# EAGLE board Stepper Driver v2 (EAGLE 5.02)
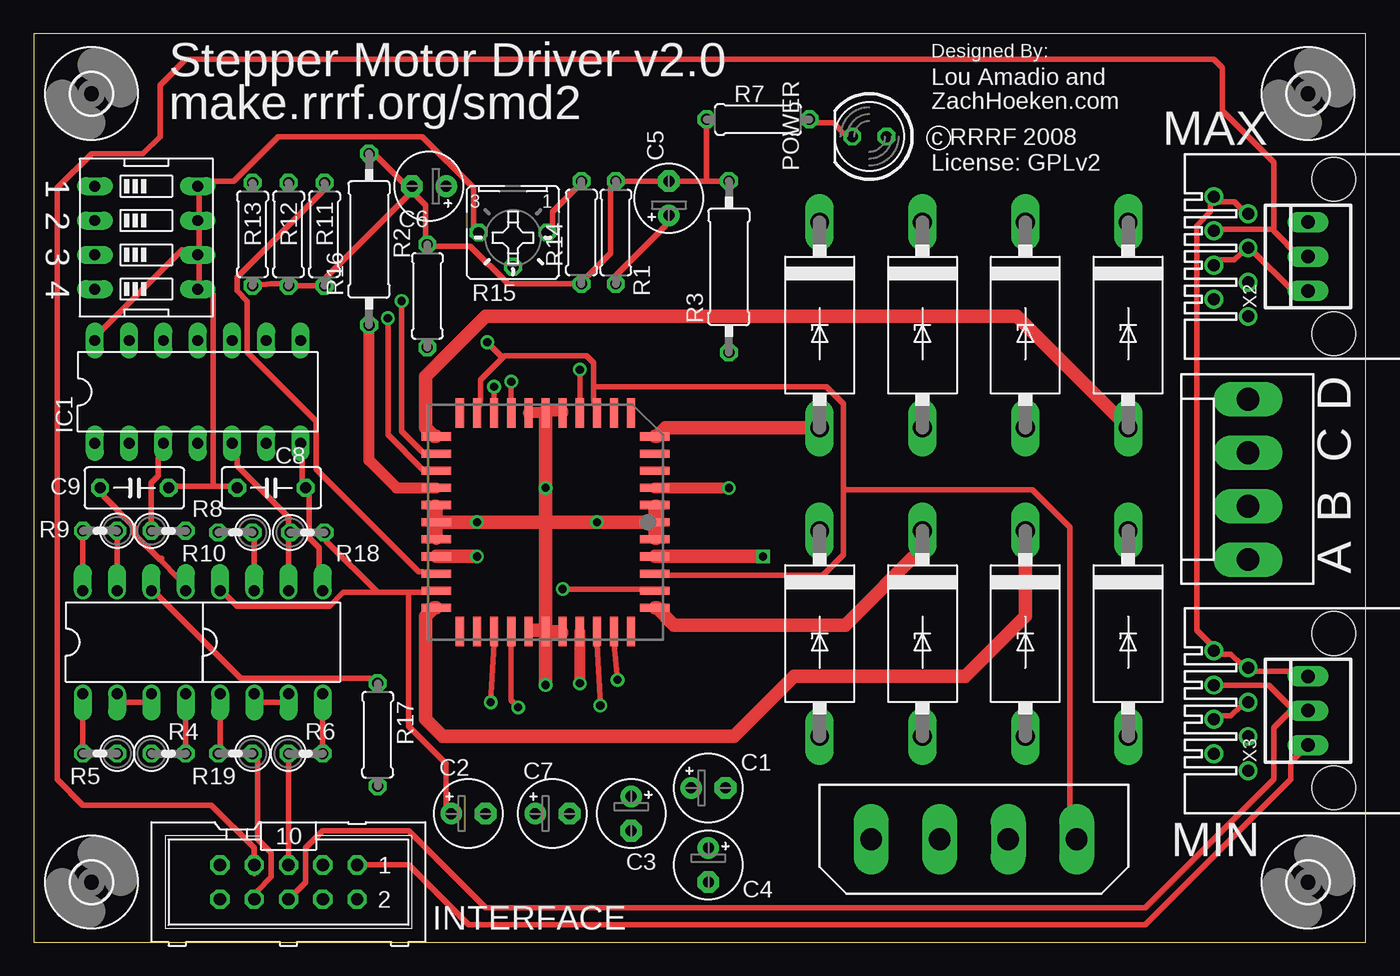
[diagram p0: board, top side]
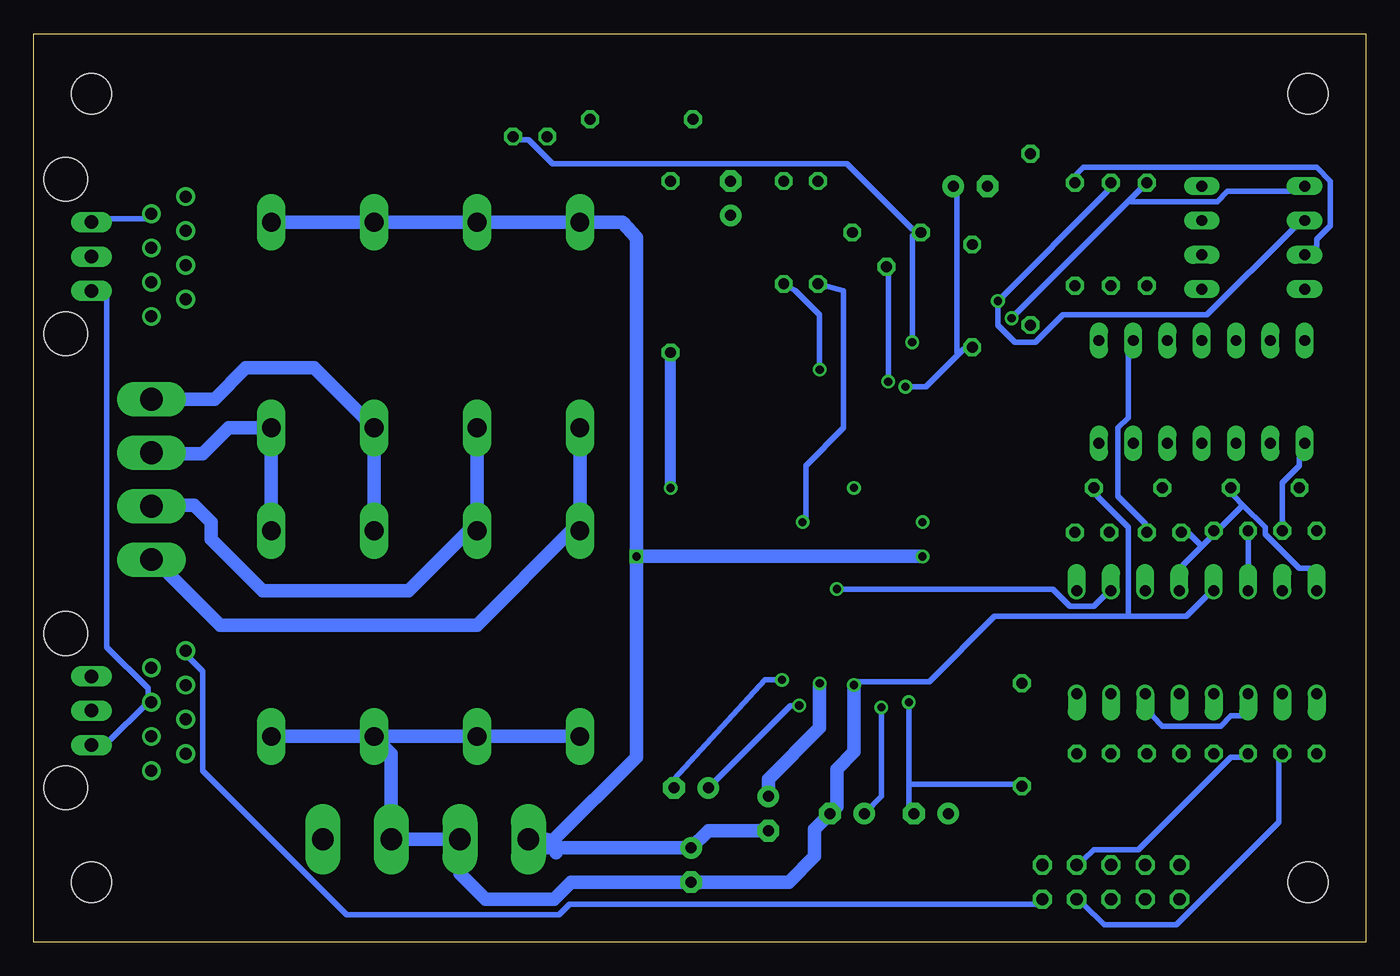
[diagram p1: board, bottom side, seen from below]

Size 98.73 x 67.3 mm. Coordinates in mm from the lower left corner, seen from the top.
Outline: 0,0 98.73,0 98.73,67.3 0,67.3 0,0
Copper layers (1*16): Top 0.035mm / dielectric 1.5mm / Bottom 0.035mm
Design rules "default": minimum track width 10mil, minimum drill 24mil, track to track 8mil, track to pad 8mil, pad to pad 8mil, via to via 8mil, smd to smd 8mil, copper to edge 40mil, drill to drill 8mil, minimum pad ring 10mil, minimum via ring 8mil, stop-mask expansion 4mil, vias tented up to drill 0mil, thermal gap 10mil
Net classes: 0 default: width 0.406 mm; 1 Power: width 1.016 mm, clearance 0.508 mm

## Footprints (pad centres in the part's own frame; a part is rotated, then mirrored left to right if it is on the bottom)
E2,5-5 = drill 0.813 pad 1.6 round: + -1.27,0 | drill 0.813 pad 1.6 octagon: - 1.27,0
C050-030X075 = drill 0.813 octagon: 1 -2.54,0; 2 2.54,0
CB429-15 = drill 1.397 long: A 7.62,0; C -7.62,0
PLCC44 = smd 0.6 x 2.2: 1 0,8.1; 2 -1.27,8.1; 3 -2.54,8.1; 4 -3.81,8.1; 5 -5.08,8.1; 6 -6.35,8.1; 18 -6.35,-8.1; 19 -5.08,-8.1; 20 -3.81,-8.1; 21 -2.54,-8.1; 22 -1.27,-8.1; 23 0,-8.1; 24 1.27,-8.1; 25 2.54,-8.1; 26 3.81,-8.1; 27 5.08,-8.1; 28 6.35,-8.1; 40 6.35,8.1; 41 5.08,8.1; 42 3.81,8.1; 43 2.54,8.1; 44 1.27,8.1 | smd 2.2 x 0.6: 7 -8.1,6.35; 8 -8.1,5.08; 9 -8.1,3.81; 10 -8.1,2.54; 11 -8.1,1.27; 12 -8.1,0; 13 -8.1,-1.27; 14 -8.1,-2.54; 15 -8.1,-3.81; 16 -8.1,-5.08; 17 -8.1,-6.35; 29 8.1,-6.35; 30 8.1,-5.08; 31 8.1,-3.81; 32 8.1,-2.54; 33 8.1,-1.27; 34 8.1,0; 35 8.1,1.27; 36 8.1,2.54; 37 8.1,3.81; 38 8.1,5.08; 39 8.1,6.35
DIL14 = drill 0.813 long: 1 -7.62,-3.81; 2 -5.08,-3.81; 3 -2.54,-3.81; 4 0,-3.81; 5 2.54,-3.81; 6 5.08,-3.81; 7 7.62,-3.81; 8 7.62,3.81; 9 5.08,3.81; 10 2.54,3.81; 11 0,3.81; 12 -2.54,3.81; 13 -5.08,3.81; 14 -7.62,3.81
520426-4 = drill 0.889 round: 1 -4.445,6.35; 2 -3.175,8.89; 3 -1.905,6.35; 4 -0.635,8.89; 5 0.635,6.35; 6 1.905,8.89; 7 3.175,6.35; 8 4.445,8.89 | hole 3.251: -5.715,0; 5.715,0
LED5MM = drill 0.813 octagon: A -1.27,0; K 1.27,0
DIL08 = drill 0.813 offset: 1 -3.81,-3.81; 2 -1.27,-3.81; 3 1.27,-3.81; 4 3.81,-3.81; 5 3.81,3.81; 6 1.27,3.81; 7 -1.27,3.81; 8 -3.81,3.81
9090-4V = drill 1.6 pad 2.6 long: 1 -7.62,0; 2 -2.54,0; 3 2.54,0; 4 7.62,0
0207/7 = drill 0.813 octagon: 1 -3.81,0; 2 3.81,0
0309/12 = drill 0.813 octagon: 1 -6.35,0; 2 6.35,0
0207/2V = drill 0.813 octagon: 1 -1.27,0; 2 1.27,0
B25P = drill 0.813 octagon: A -2.54,0; E 2.54,0; S 0,2.54
ML10 = drill 0.914 octagon: 1 -5.08,-1.27; 2 -5.08,1.27; 3 -2.54,-1.27; 4 -2.54,1.27; 5 0,-1.27; 6 0,1.27; 7 2.54,-1.27; 8 2.54,1.27; 9 5.08,-1.27; 10 5.08,1.27
EDG-04 = drill 0.813 long: 1 -3.81,-3.81; 2 -1.27,-3.81; 3 1.27,-3.81; 4 3.81,-3.81; 5 3.81,3.81; 6 1.27,3.81; 7 -1.27,3.81; 8 -3.81,3.81
3,0 = hole 3: 0,0
KK-156-4 = drill 1.7 pad 2.184 long: 1 -5.94,0; 2 -1.98,0; 3 1.98,0; 4 5.94,0
22-23-2031 = drill 1 long: 1 -2.54,0; 2 0,0; 3 2.54,0

## Placement (x,y rotation side)
C1  .22uF  [E2,5-5]  50,11.42 0 top
C2  .001uF  [E2,5-5]  32.22,9.52 0 top
C3  .22uF  [E2,5-5]  44.29,9.52 270 top
C4  100uF  [E2,5-5]  50,5.71 270 top
C5  680pF  [E2,5-5]  47.08,55.11 90 top
C6  [E2,5-5]  29.3,56 180 top
C7  .33uF  [E2,5-5]  38.44,9.52 0 top
C8  [C050-030X075]  17.62,33.65 180 top
C9  [C050-030X075]  7.46,33.65 0 top
D1M  SB360  [CB429-15]  58.26,22.86 270 top
D1P  SB360  [CB429-15]  58.26,45.71 270 top
D2M  SB360  [CB429-15]  65.88,22.86 270 top
D2P  SB360  [CB429-15]  65.88,45.71 270 top
D3M  Sb360  [CB429-15]  73.49,22.86 270 top
D3P  SB360  [CB429-15]  73.49,45.71 270 top
D4M  SB360  [CB429-15]  81.11,22.86 270 top
D4P  SB360  [CB429-15]  81.11,45.71 270 top
DRIVER  A3977  [PLCC44]  37.94,31.11 270 top
IC1  74ALS04N  [DIL14]  12.15,40.76 0 top
J1  [520426-4]  96.35,50.79 90 top
J2  [520426-4]  96.35,17.14 90 top
LED1  [LED5MM]  61.94,59.68 180 top
OK1  HCPL2630  [DIL08]  17.62,22.22 0 top
OK2  HCPL2630  [DIL08]  7.46,22.22 0 top
POWER  9090-4V  [9090-4V]  69.68,7.62 180 top
R1  20k  [0207/7]  43.14,52.57 270 top
R2  20k  [0207/7]  29.17,47.87 270 top
R3  0.75  [0309/12]  51.52,50.03 90 top
R4  220  [0207/2V]  10,13.96 0 top
R5  220  [0207/2V]  4.92,13.96 180 top
R6  220  [0207/2V]  20.16,13.96 0 top
R7  560  [0207/7]  53.68,60.95 0 top
R8  3.3k  [0207/2V]  10,30.48 0 top
R9  3.3k  [0207/2V]  4.92,30.48 180 top
R10  3.3k  [0207/2V]  20.28,30.35 0 top
R11  10K  [0207/7]  21.55,52.45 270 top
R12  10K  [0207/7]  18.89,52.45 270 top
R13  10K  [0207/7]  16.22,52.45 270 top
R14  2.2k  [0207/7]  40.6,52.57 90 top
R15  [B25P]  35.52,52.57 180 top
R16  0.75  [0309/12]  24.85,52.06 90 top
R17  1K  [0207/7]  25.49,15.36 270 top
R18  3.3k  [0207/2V]  14.95,30.35 180 top
R19  220  [0207/2V]  14.95,13.96 180 top
SV1  [ML10]  18.89,4.44 180 top
SW1  [EDG-04]  8.34,52.19 270 top
U$1  [3,0]  4.28,62.86 0 top
U$2  [3,0]  94.45,62.86 0 top
U$3  [3,0]  4.28,4.44 0 top
U$4  [3,0]  94.45,4.44 0 top
X1  [KK-156-4]  90,34.28 90 top
X2  22-23-2031  [22-23-2031]  94.45,50.79 90 top
X3  22-23-2031  [22-23-2031]  94.45,17.14 90 top

## Library data of the parts
C1-C9 R3-R13 R16 R17 = rcl
D1M D1P D2M D2P D3M D3P D4M D4P = diode
DRIVER = linear
IC1 = 74xx-us
J1 J2 = con-amp
LED1 = led
OK1 OK2 = optocoupler
POWER = con-thomas-betts
R1 R2 R14 R18 R19 = resistor
R15 = pot
SV1 = con-harting-ml
SW1 = special
U$1-U$4 = holes
X1-X3 = con-molex

## Nets
A [Power]: D1M.C D1P.A DRIVER.6 X1.1
B [Power]: D2M.C D2P.A DRIVER.40 X1.2
C: D4M.C D4P.A DRIVER.18 X1.3
D [Power]: D3M.C D3P.A DRIVER.28 X1.4
DIR: DRIVER.5
ENABLE: DRIVER.41
EXT_DIR: R5.1 SV1.4
EXT_ENABLE: R6.1 SV1.5
EXT_GND: J1.7 J1.8 J2.7 J2.8 SV1.2 X2.3 X3.3
EXT_STEP: R4.1 SV1.3
EXT_VCC: J1.4 J1.5 J2.4 J2.5 SV1.1 X2.1 X3.1
EXTRA: R19.1 SV1.8
GND: C4.- C5.- C6.- C7.- C8.1 C9.1 D1M.A D2M.A D3M.A D4M.A DRIVER.1 DRIVER.2 DRIVER.11 DRIVER.12 DRIVER.13 DRIVER.22 DRIVER.23 DRIVER.24 DRIVER.33 DRIVER.34 DRIVER.35 DRIVER.44 IC1.7 OK1.5 OK2.5 POWER.2 POWER.3 R1.1 R2.1 R3.2 R7.1 R11.2 R12.2 R13.2 R14.1 R16.2
MAX: J1.6 SV1.7 X2.2
MIN: J2.6 SV1.6 X3.2
MS1: DRIVER.20 R13.1 SW1.1
MS2: DRIVER.19 R12.1 SW1.2
N$1: C7.+ DRIVER.32
N$2: DRIVER.21 R16.1
N$3: DRIVER.3 R3.1
N$4 [Power]: C3.+ DRIVER.36
N$5: C1.+ DRIVER.37
N$6: C1.- DRIVER.38
N$7: C5.+ DRIVER.10 R1.2
N$8: LED1.K R7.2
N$9: R14.2 R15.A
N$10: OK1.2 OK1.3 OK2.2 OK2.3
N$11: C6.+ DRIVER.15 R2.2
N$12: OK2.4 R4.2
N$13: DRIVER.14 R15.S
N$14: C2.- DRIVER.31 R17.2
N$15: OK2.1 R5.2
N$16: IC1.3 OK2.6 R8.1
N$18: OK1.4 R6.2
N$19: IC1.1 OK2.7 R9.1
N$20: IC1.5 OK1.6 R10.1
N$21: IC1.2
N$22: IC1.4
N$23: IC1.6
N$25: IC1.9 OK1.7 R18.1
N$26: OK1.1 R19.2
SR: DRIVER.26 R11.1 SW1.3
STEP: R17.1
VC+ [Power]: C3.- C4.+ D1P.C D2P.C D3P.C D4P.C DRIVER.25 DRIVER.43 POWER.4
VCC: C2.+ C8.2 C9.2 DRIVER.9 DRIVER.16 DRIVER.27 DRIVER.42 IC1.14 LED1.A OK1.8 OK2.8 POWER.1 R8.2 R9.2 R10.2 R15.E R18.2 SW1.5 SW1.6 SW1.7 SW1.8

## Tracks (layer width: path | path; a pad name or v marks a point on that pad's centre or on a via)
A
  Top 1.016: DRIVER.6 46.19,37.46 46.83,38.09 D1P.A
  Bottom 1.016: X1.1 90,28.57 84.92,23.49 65.88,23.49 58.89,30.48 D1M.C D1P.A 58.26,38.73
B
  Top 1.016: D2M.C 65.88,29.21 60.16,23.49 47.46,23.49 46.19,24.76 DRIVER.40
  Bottom 1.016: D2P.A D2M.C 66.51,30.48 70.95,26.03 81.75,26.03 85.56,29.84 85.56,31.11 86.83,32.38 90,32.38 X1.2
C
  Top 1.016: D4P.A 72.86,46.35 33.49,46.35 29.05,41.9 29.05,38.09 29.68,37.46 DRIVER.18
  Bottom 1.016: D4M.C D4P.A 84.29,38.09 86.19,36.19 90,36.19 X1.3
D
  Top 1.016: D3M.C 73.49,24.12 69.05,19.68 56.35,19.68 51.91,15.23 30.32,15.23 29.05,16.51 29.05,24.12 29.68,24.76 DRIVER.28
  Bottom 1.016: D3M.C D3P.A 77.94,42.54 83.02,42.54 85.33,40.22 X1.4
ENABLE  (via drill 0.61)
  Top 0.406: v39.2,26.16 45.05,26.16 DRIVER.41
  Bottom 0.406: v39.2,26.16 23.2,26.16 21.93,24.89 20.16,24.89 19.39,25.65
EXT_DIR
  Bottom 0.406: R5.1 6.44,13.46 6.44,8.88 14.06,1.27 19.39,1.27 20.92,2.79 SV1.4
EXT_ENABLE
  Top 0.406: SV1.5 R6.1
EXT_GND
  Top 0.406: J1.7 89.5,54.35 88.99,54.86 87.97,54.86 J1.8 87.21,54.6 87.21,54.1 86.19,53.08 86.19,23.11 87.21,22.09 J2.8 87.97,21.33 88.73,21.33 89.5,20.57 J2.7 90.51,20.06 93.05,20.06 X3.3
  Bottom 0.406: J1.7 90.51,53.59 93.05,53.59 X2.3 | SV1.2 24.47,2.79 59.02,2.79 59.78,2.03 75.53,2.03 86.19,12.69 86.19,20.06 87.21,21.08 J2.8
EXT_STEP
  Bottom 0.406: R4.1 9.23,13.71 10,13.71 16.85,6.85 20.16,6.85 20.92,6.09 SV1.3
EXT_VCC
  Top 0.406: SV1.1 27.78,5.71 32.22,1.27 82.38,1.27 93.18,12.06 93.18,13.33 X3.1 | J2.4 87.97,16.76 88.73,16.76 89.5,17.52 J2.5 | J1.4 87.97,50.54 88.99,50.54 89.5,51.05 J1.5 90.51,51.05 93.05,48.51 X2.1
  Bottom 0.406: X3.1 93.05,14.98 90.51,17.52 J2.5 90.26,18.28 90.26,18.79 93.31,21.84 93.31,47.75 X2.1
EXTRA
  Top 0.406: R19.1 16.6,13.46 16.6,7.62 17.62,6.6 17.62,4.82 16.6,3.81 SV1.8
GND  (via drill 0.6)
  Top 0.254: DRIVER.2 46.06,32.25 | DRIVER.1 46.06,31.24 | 36.92,23.11 DRIVER.33 | 37.68,23.11 DRIVER.34 | DRIVER.35 38.95,23.11
  Top 0.406: 9.36,28.32 10.76,26.92 OK2.5 | 9.36,28.32 7.46,30.22 7.46,30.73 5.17,33.02 C9.1 | 9.36,28.32 9.49,28.44 | 49.87,56.38 R3.2 | 49.87,56.38 C5.- R1.1 42.76,55.88 42.76,51.05 40.98,49.27 R14.1 35.14,48.76 32.35,51.56 29.81,51.56 R2.1 29.05,52.32 29.05,54.6 28.28,55.37 C6.- | 49.87,56.38 R7.1 | R13.2 17.62,48.76 19.14,48.76 R12.2 R11.2 21.68,49.27 27.78,55.37 C6.- | IC1.7 19.9,35.81 19.9,34.28 C8.1 20.41,33.02 20.41,29.97 21.17,29.21 21.17,27.94 OK1.5 | R16.2 25.49,58.16 27.52,56.13 C6.-
  Top 0.813: 37.78,39.21 DRIVER.13 | DRIVER.11 39.2,39.36 37.94,39.36 | DRIVER.2 46.19,32.38 46.04,32.22 | DRIVER.44 46.19,29.84 46.04,30 | 29.68,31.11 DRIVER.24 | DRIVER.22 29.68,32.38 29.84,32.22 | DRIVER.35 39.2,22.86 39.05,23.01
  Top 1.016: DRIVER.1 46.19,31.11 | 37.94,31.11 v32.86,31.11 DRIVER.23 | 37.94,31.11 v41.74,31.11 DRIVER.1 | DRIVER.34 37.94,31.11 | 37.94,31.11 v37.94,33.65 DRIVER.12 37.94,39.36 37.78,39.21 | DRIVER.1 46.04,32.22 | DRIVER.1 46.04,30 | DRIVER.23 29.84,30 29.68,31.11 | DRIVER.23 29.84,32.22 | DRIVER.34 39.05,23.01 | 36.92,23.11 37.68,23.11 37.94,22.86 | 37.94,22.86 DRIVER.34 | v37.94,19.05 37.94,22.86
  Bottom 0.406: 17.62,24.12 13.3,24.12 11.77,25.65 OK2.5 | 17.62,24.12 27.52,24.12 32.35,19.3 37.68,19.3 v37.94,19.05 | R14.1 38.7,48.25 38.7,38.09 41.49,35.3 41.49,31.49 v41.74,31.11 | 17.62,24.12 17.62,30.73 19.9,33.02 C8.1
  Bottom 1.016: D3M.A 72.22,13.96 POWER.2 POWER.3 67.14,5.08 65.24,3.17 60.16,3.17 58.89,4.44 C4.- 42.76,4.44 40.86,6.34 40.86,8.38 C7.- 39.2,10.03 39.2,12.82 37.94,14.09 v37.94,19.05 | D3M.A D4M.A | D3M.A D2M.A D1M.A
MAX
  Top 0.406: X2.2 93.81,50.79 91.91,52.7 91.91,52.83 | 91.91,52.83 91.91,57.78 88.1,61.59 88.1,64.77 87.46,65.4 11.27,65.4 9.36,63.49 9.36,59.68 8.09,58.41 4.28,58.41 1.74,55.88 1.74,12.06 3.65,10.15 13.17,10.15 16.35,6.98 SV1.7 16.35,5.08 | J1.6 87.97,52.83 91.91,52.83
MIN
  Top 0.406: SV1.6 20.16,4.44 20.16,6.98 21.43,8.25 27.78,8.25 33.49,2.54 82.38,2.54 91.91,12.06 91.91,15.87 93.18,17.14 X3.2 93.05,17.52 91.53,19.05 J2.6
MS1  (via drill 0.61)
  Top 0.406: v26.25,46.22 26.25,37.59 28.79,35.05 DRIVER.20
  Bottom 0.406: 17.49,54.99 v26.25,46.22 | 17.49,54.99 R13.1 | SW1.1 5.68,55.62 10.25,55.62 11.01,54.86 17.36,54.86 17.49,54.99
MS2  (via drill 0.61)
  Top 0.406: v27.27,47.49 27.27,37.84 28.79,36.32 DRIVER.19
  Bottom 0.406: R12.1 19.14,55.62 v27.27,47.49 27.27,45.71 26,44.45 24.47,44.45 22.44,46.48 11.77,46.48 5.42,52.83 SW1.2
N$1  (via drill 0.6)
  Top 0.406: v35.9,17.39 35.4,17.9 DRIVER.32
  Bottom 0.406: C7.+ 35.9,10.79 v35.9,17.39
N$2
  Top 0.813: R16.1 24.85,35.68 26.89,33.65 DRIVER.21
N$3  (via drill 0.61)
  Top 0.813: DRIVER.3 v51.52,33.65
  Bottom 0.813: v51.52,33.65 R3.1
N$4  (via drill 0.6)
  Top 0.813: v40.48,19.17 DRIVER.36
  Bottom 1.016: v40.48,19.17 40.48,15.87 44.29,12.06 C3.+
N$5  (via drill 0.61)
  Top 0.406: v42,17.52 41.74,22.09 DRIVER.37
  Bottom 0.406: v42,17.52 42.63,17.52 C1.+
N$6  (via drill 0.61)
  Top 0.406: v43.27,19.43 43.02,22.09 DRIVER.38
  Bottom 0.406: v43.27,19.43 44.54,19.43 51.27,12.06 C1.-
N$7  (via drill 0.61)
  Top 0.406: DRIVER.10 v40.48,42.41 | C5.+ 46.83,53.08 43.02,49.27 R1.2
  Bottom 0.406: v40.48,42.41 40.48,46.48 42.25,48.25 R1.2
N$8
  Top 0.406: R7.2 58,60.7 59.27,60.7 60.03,59.94 LED1.K
N$9
  Top 0.406: R15.A 38.44,53.08 38.44,54.1 40.22,55.88 R14.2
N$10
  Top 0.406: OK2.2 6.69,17.78 8.22,17.78 OK2.3 | OK1.2 16.85,17.78 18.38,17.78 OK1.3
  Bottom 0.406: OK2.3 9.23,16.76 10,16.76 10.76,16 15.08,16 15.84,16.76 OK1.2
N$11  (via drill 0.61)
  Top 0.406: v34.12,41.14 DRIVER.15
  Bottom 0.406: v34.12,41.14 32.6,41.14 30.19,43.56 | 30.19,43.56 29.81,43.94 R2.2 | C6.+ 30.32,55.37 30.32,43.68 30.19,43.56
N$12
  Top 0.406: R4.2 OK2.4
N$13  (via drill 0.61)
  Top 0.406: DRIVER.14 v35.4,41.52
  Bottom 0.406: v35.4,41.52 35.4,49.52 R15.S
N$14  (via drill 0.61)
  Top 0.406: v33.87,17.78 34.12,22.09 DRIVER.31
  Bottom 0.406: 33.87,11.68 33.87,10.15 C2.- | 33.87,11.68 v33.87,17.78 | 33.87,11.68 26,11.68 R17.2
N$15
  Top 0.406: R5.2 OK2.1
N$16
  Top 0.406: IC1.3 9.23,35.81 9.23,34.54 8.73,34.03 R8.1
  Bottom 0.406: OK2.6 R8.1
N$18
  Top 0.406: R6.2 OK1.4
N$19
  Top 0.406: OK2.7 R9.1
  Bottom 0.406: IC1.1 4.92,35.81 4.92,35.3 6.18,34.03 R9.1
N$20
  Top 0.406: OK1.6 18.89,29.71 R10.1 18.89,30.98 18.89,31.49 15.08,35.3 15.08,35.81 IC1.5
N$25
  Top 0.406: OK1.7 16.35,29.71 R18.1
  Bottom 0.406: IC1.9 17.62,43.43 17.62,38.86 18.38,38.09 18.38,33.02 16.35,30.98 R18.1
N$26
  Top 0.406: R19.2 13.81,14.47 OK1.1
SR
  Top 0.406: DRIVER.26 28.79,27.43 28.54,27.43 20.92,35.05 20.92,38.6 15.84,43.68 15.84,47.49 15.08,48.25 15.08,49.27 21.43,55.62 R11.1
  Bottom 0.406: SW1.3 3.65,51.56 3.65,52.06 2.63,53.08 2.63,56.38 3.65,57.4 20.92,57.4 21.93,56.38 R11.1
STEP
  Top 0.406: 9.23,25.65 15.33,19.55 24.98,19.55 R17.1
VC+  (via drill 0.6)
  Top 1.016: v54.06,28.57 DRIVER.43 | v32.86,28.57 DRIVER.25
  Bottom 1.016: D4P.C D3P.C D2P.C D1P.C 55.08,53.34 54.06,52.19 v54.06,28.57 | 60.29,7.49 54.06,13.71 v54.06,28.57 | 60.29,7.49 60.8,7.62 POWER.4 61.43,6.98 C4.+ 48.73,8.25 C3.- | 60.29,7.49 60.03,6.6 | v54.06,28.57 v32.86,28.57
VCC  (via drill 0.61)
  Top 0.406: OK2.8 R9.2 | 34.76,43.3 34.89,43.43 40.98,43.43 41.49,42.92 41.49,41.14 | 34.76,43.3 33.11,41.65 33.11,40.13 DRIVER.16 | 41.49,41.14 41.49,40.13 DRIVER.9 | 60.03,33.52 60.03,39.87 58.76,41.14 41.49,41.14 | 60.03,33.52 60.03,28.7 58.51,27.17 47.08,27.17 DRIVER.42 | 60.03,33.52 74,33.52 76.8,30.73 76.8,10.15 POWER.1 | 25.49,25.9 27.78,25.9 | 25.49,25.9 22.95,25.9 21.93,24.89 15.08,24.89 14.31,25.65 OK1.8 | 27.78,25.9 28.79,25.9 DRIVER.27 | 13.3,33.78 14.57,33.78 C8.2 | 13.3,33.78 10.5,33.78 C9.2 | 27.78,25.9 27.78,16 30.57,13.2 30.57,10.15 C2.+ | SW1.6 12.28,50.29 12.28,49.02 SW1.5 13.3,48 13.3,33.78 | SW1.6 12.28,51.56 12.28,52.83 SW1.7 12.28,54.1 12.28,55.37 SW1.8 13.3,56.38 14.82,56.38 18.12,59.68 28.79,59.68 32.6,55.88 32.6,53.08 R15.E | v33.62,44.45 34.76,43.3 | 25.49,25.9 21.68,29.71 R10.2 | IC1.14 5.17,45.46 11.01,51.3 SW1.6
  Bottom 0.406: 12.15,29.33 13.55,27.94 OK1.8 | 12.15,29.33 11.52,29.97 R8.2 10.76,30.73 9.11,32.38 | 9.11,32.38 7.46,30.73 7.46,30.22 4.92,27.68 4.15,27.68 OK2.8 | 9.11,32.38 9.74,33.02 C9.2 | LED1.A 62.57,59.43 62.06,59.43 60.29,57.65 38.44,57.65 33.62,52.83 R15.E 33.62,52.32 v33.62,44.45 | R18.2 13.04,30.22 12.15,29.33

## Text on the board
tPlace: Designed By: | Stepper Motor Driver v2.0 | Lou Amadio and | ZachHoeken.com | make.rrrf.org/smd2 | c RRRF 2008 | MAX | 1 | POWER | License: GPLv2 | 2 | 3 | 4 | D | C | B | A | MIN | INTERFACE